# Altium PCB f3.PcbDoc (part 1 of 2)
Units mm, origin at the board's own origin, x right, y up, seen from the top; angles counter-clockwise.
Board outline 43.2 x 39.9 mm, 6 copper layers (Top Layer, layer 2, flex top, flex bottom, layer 5, Bottom Layer), stack 1.565 mm thick; 123 components, 105 nets, 511 pads, 153 vias.
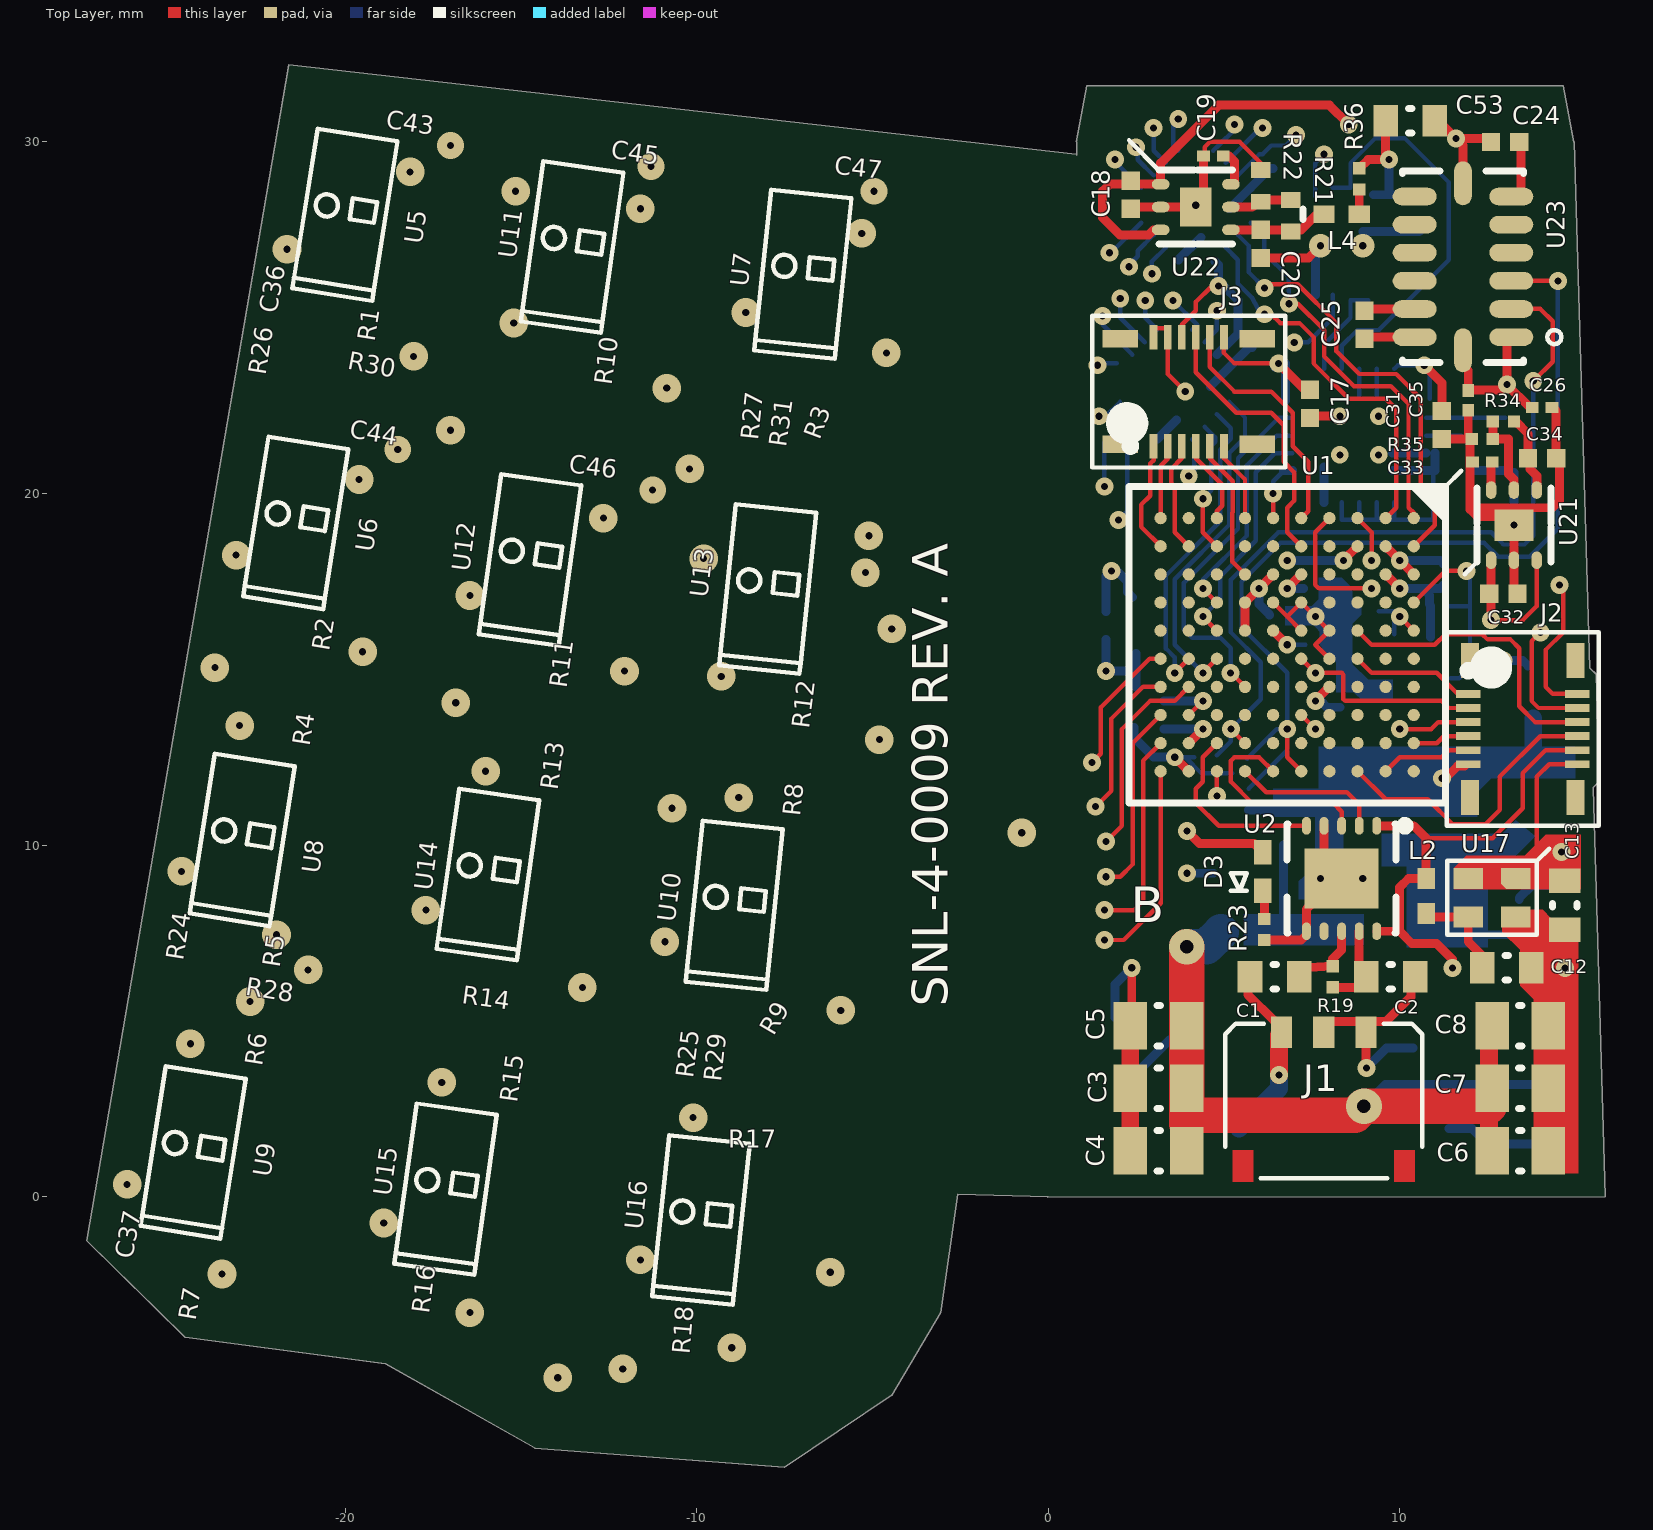
[diagram p0: Top Layer view]
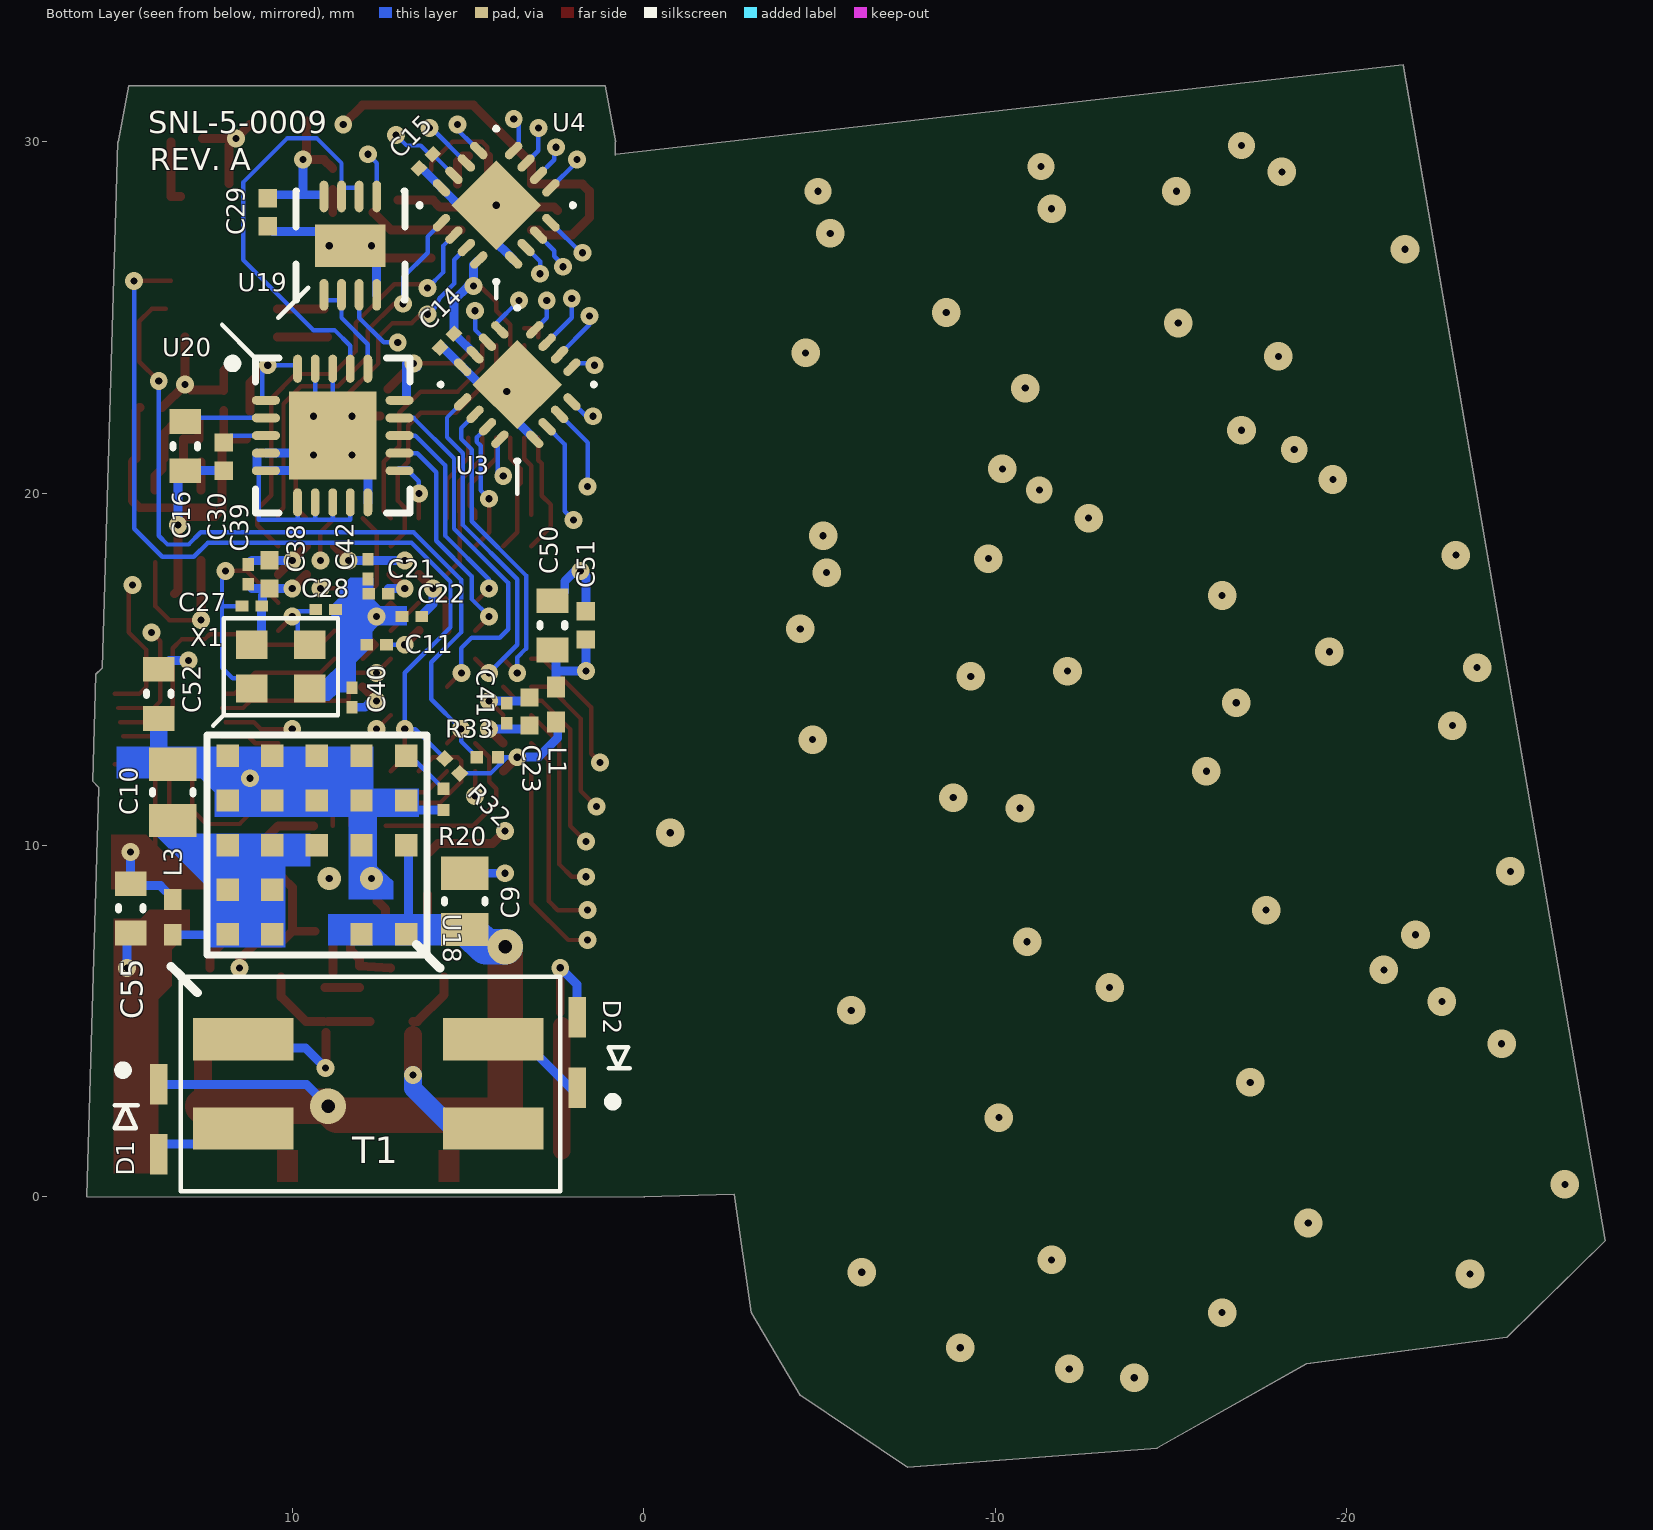
[diagram p1: Bottom Layer view, seen from below]
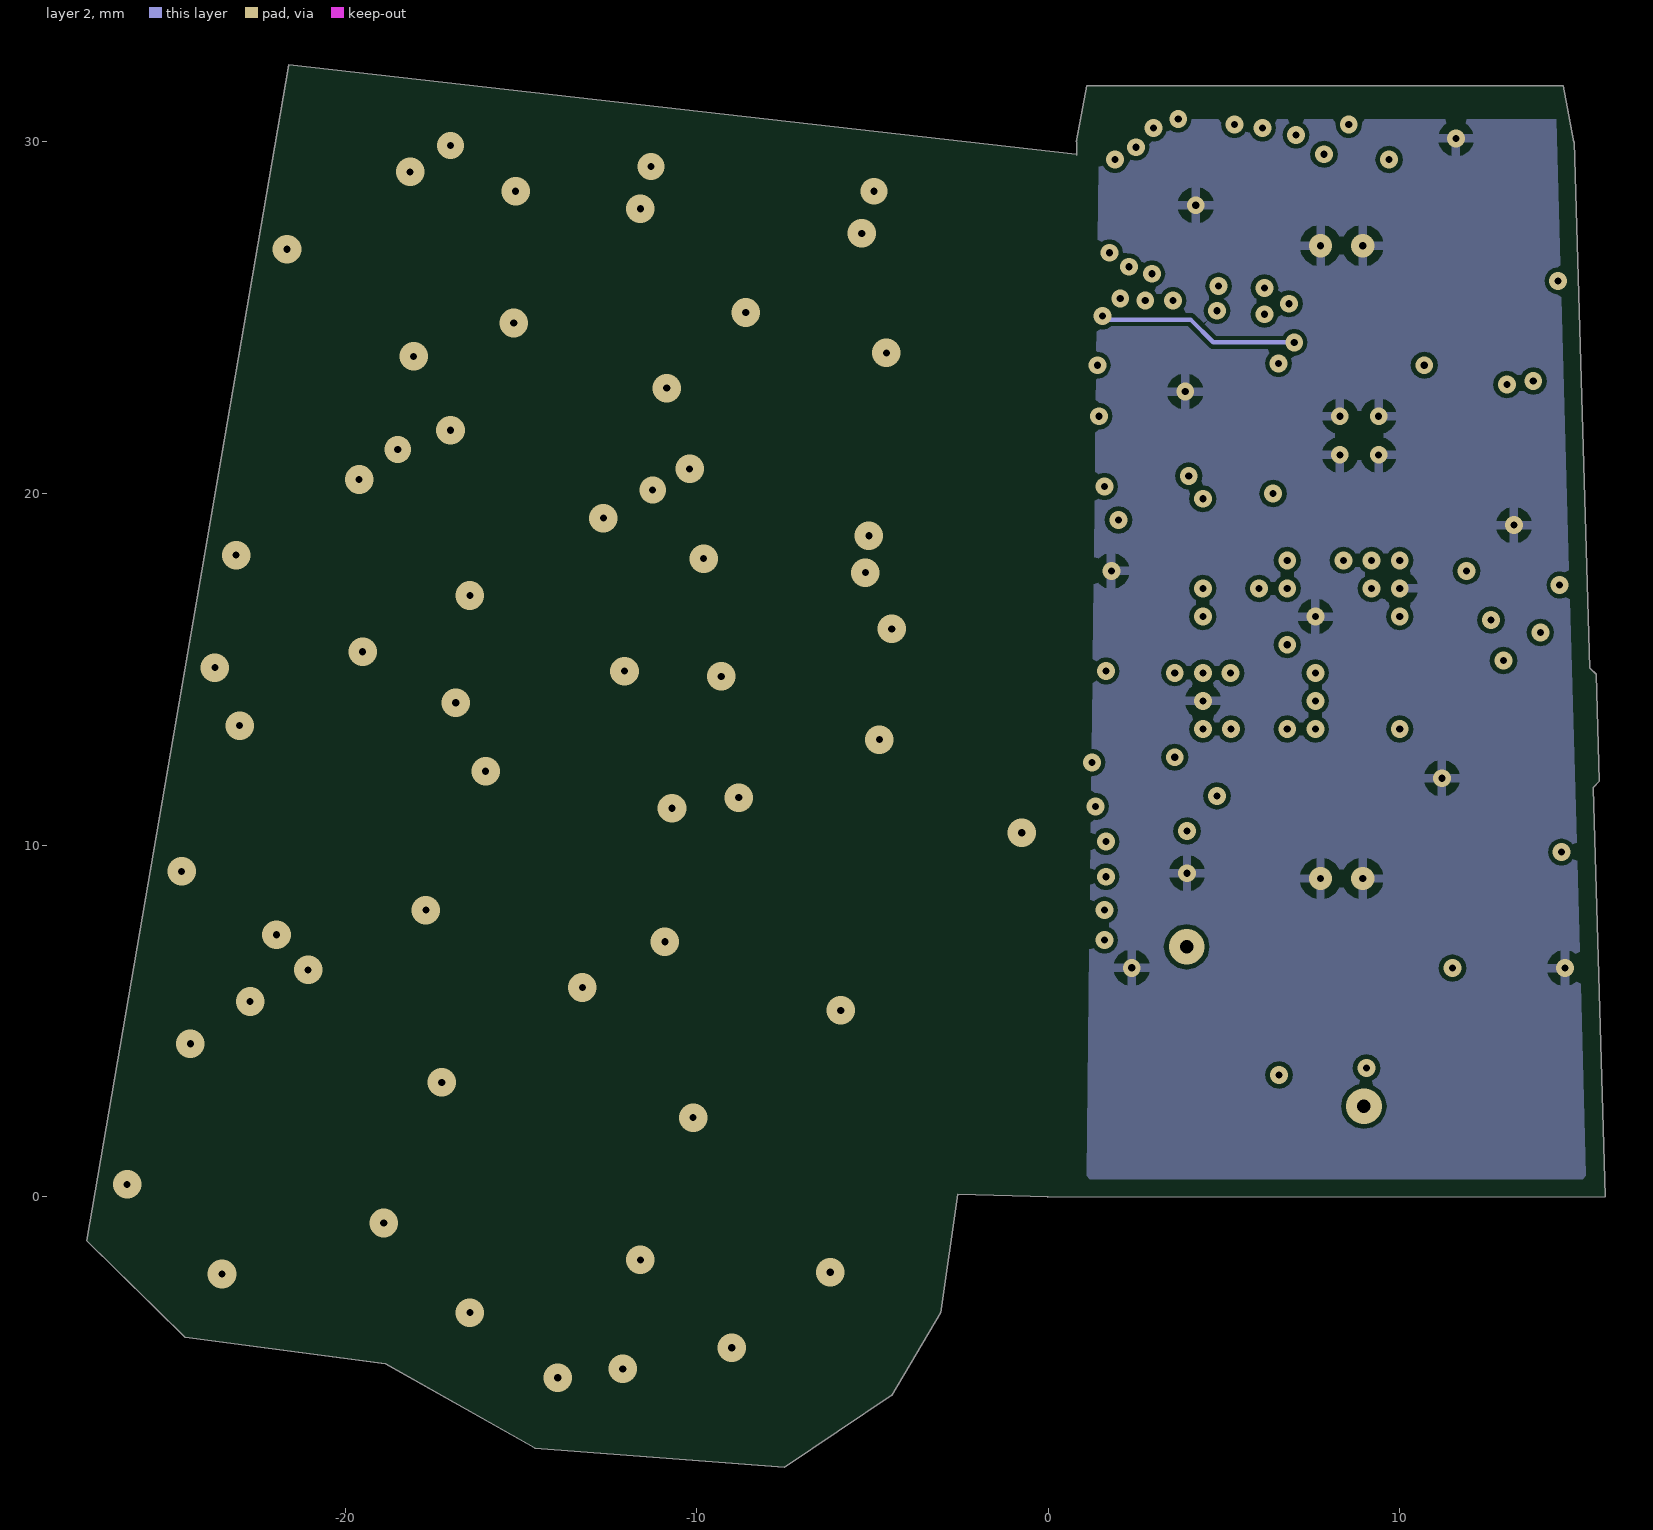
[diagram p2: layer 2]
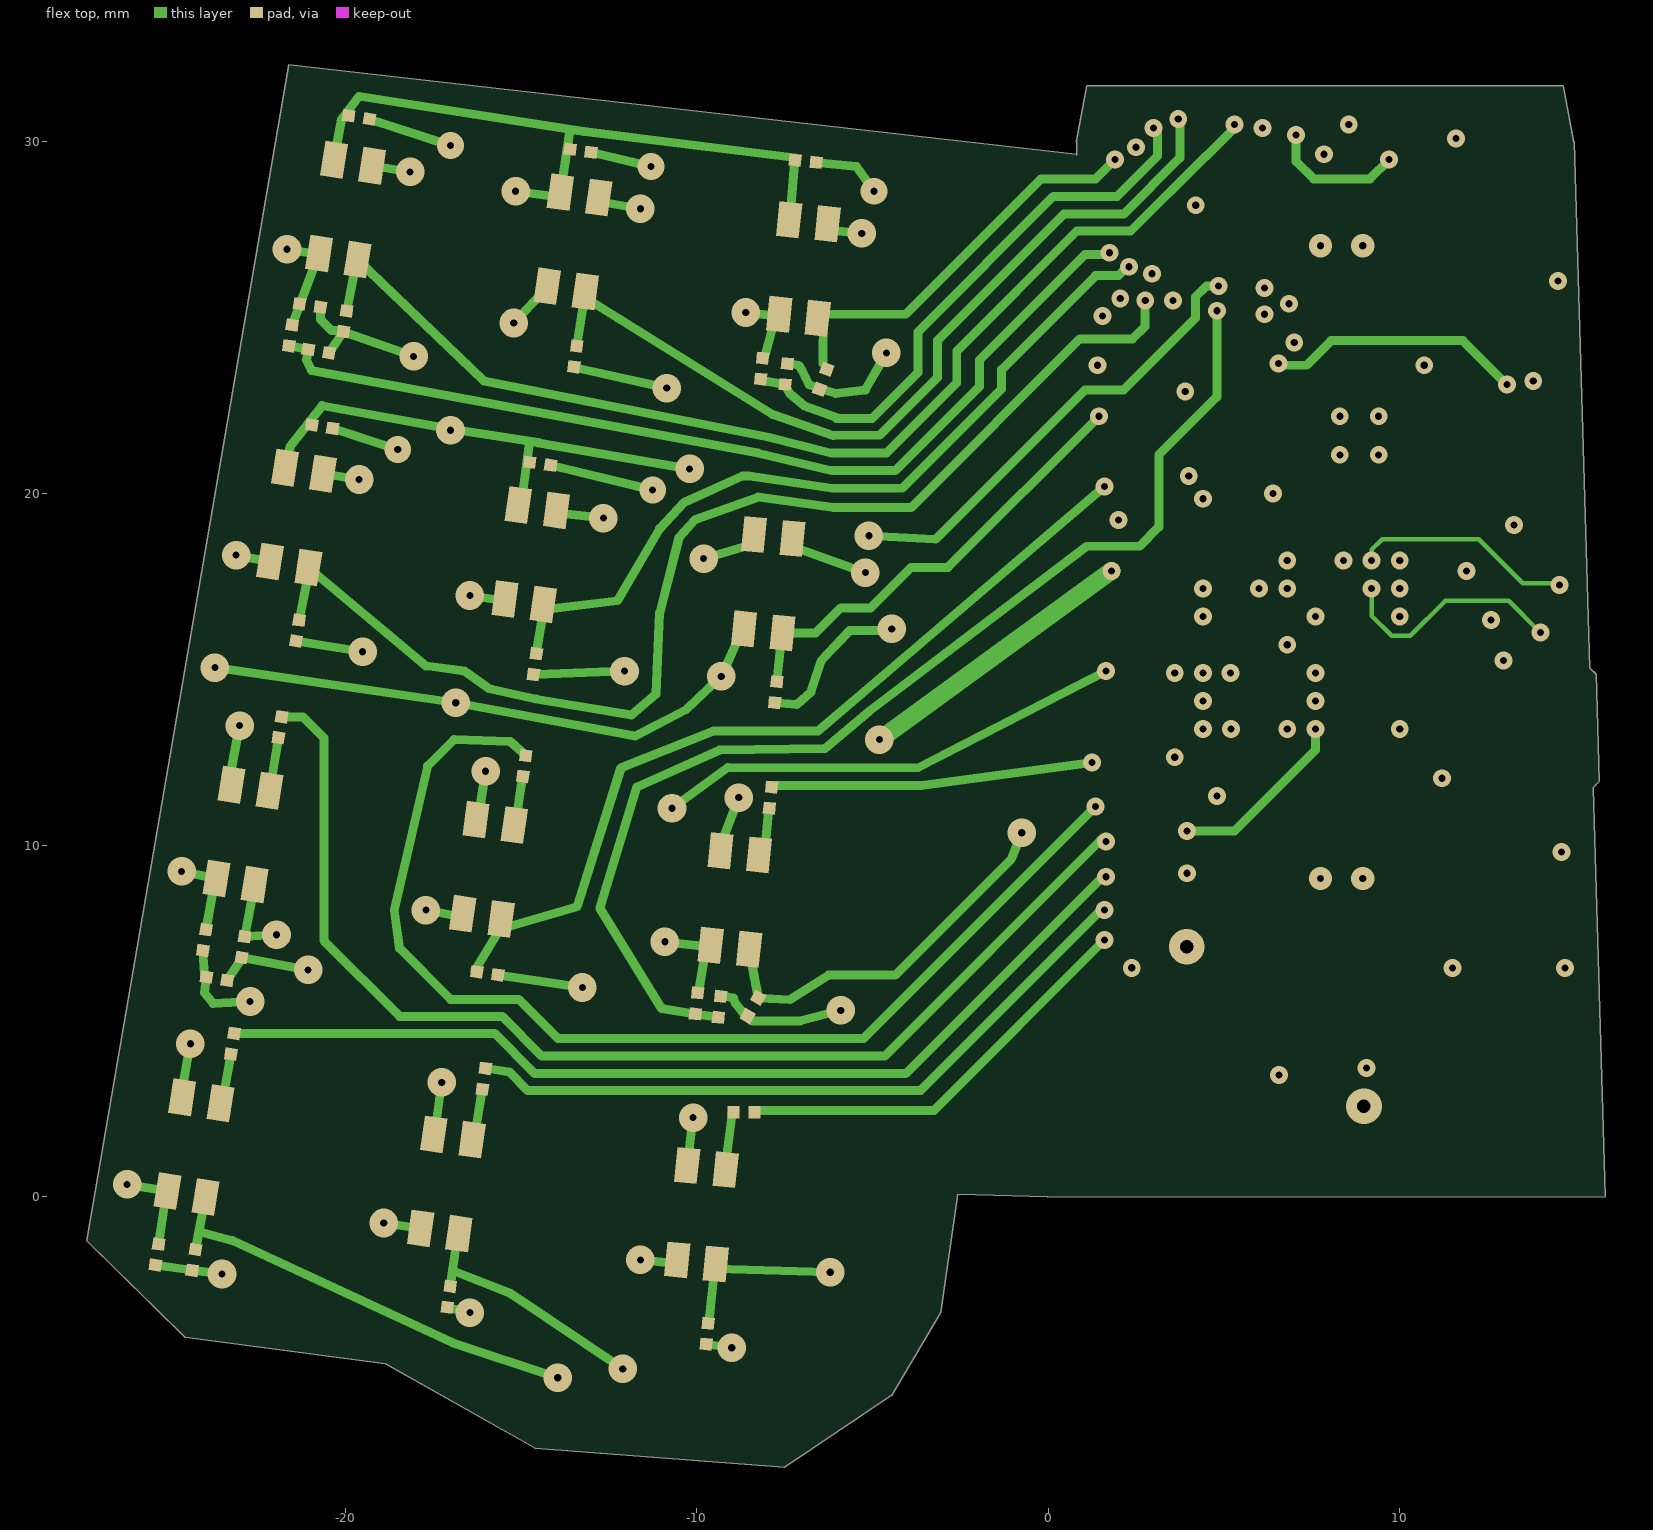
[diagram p3: flex top]
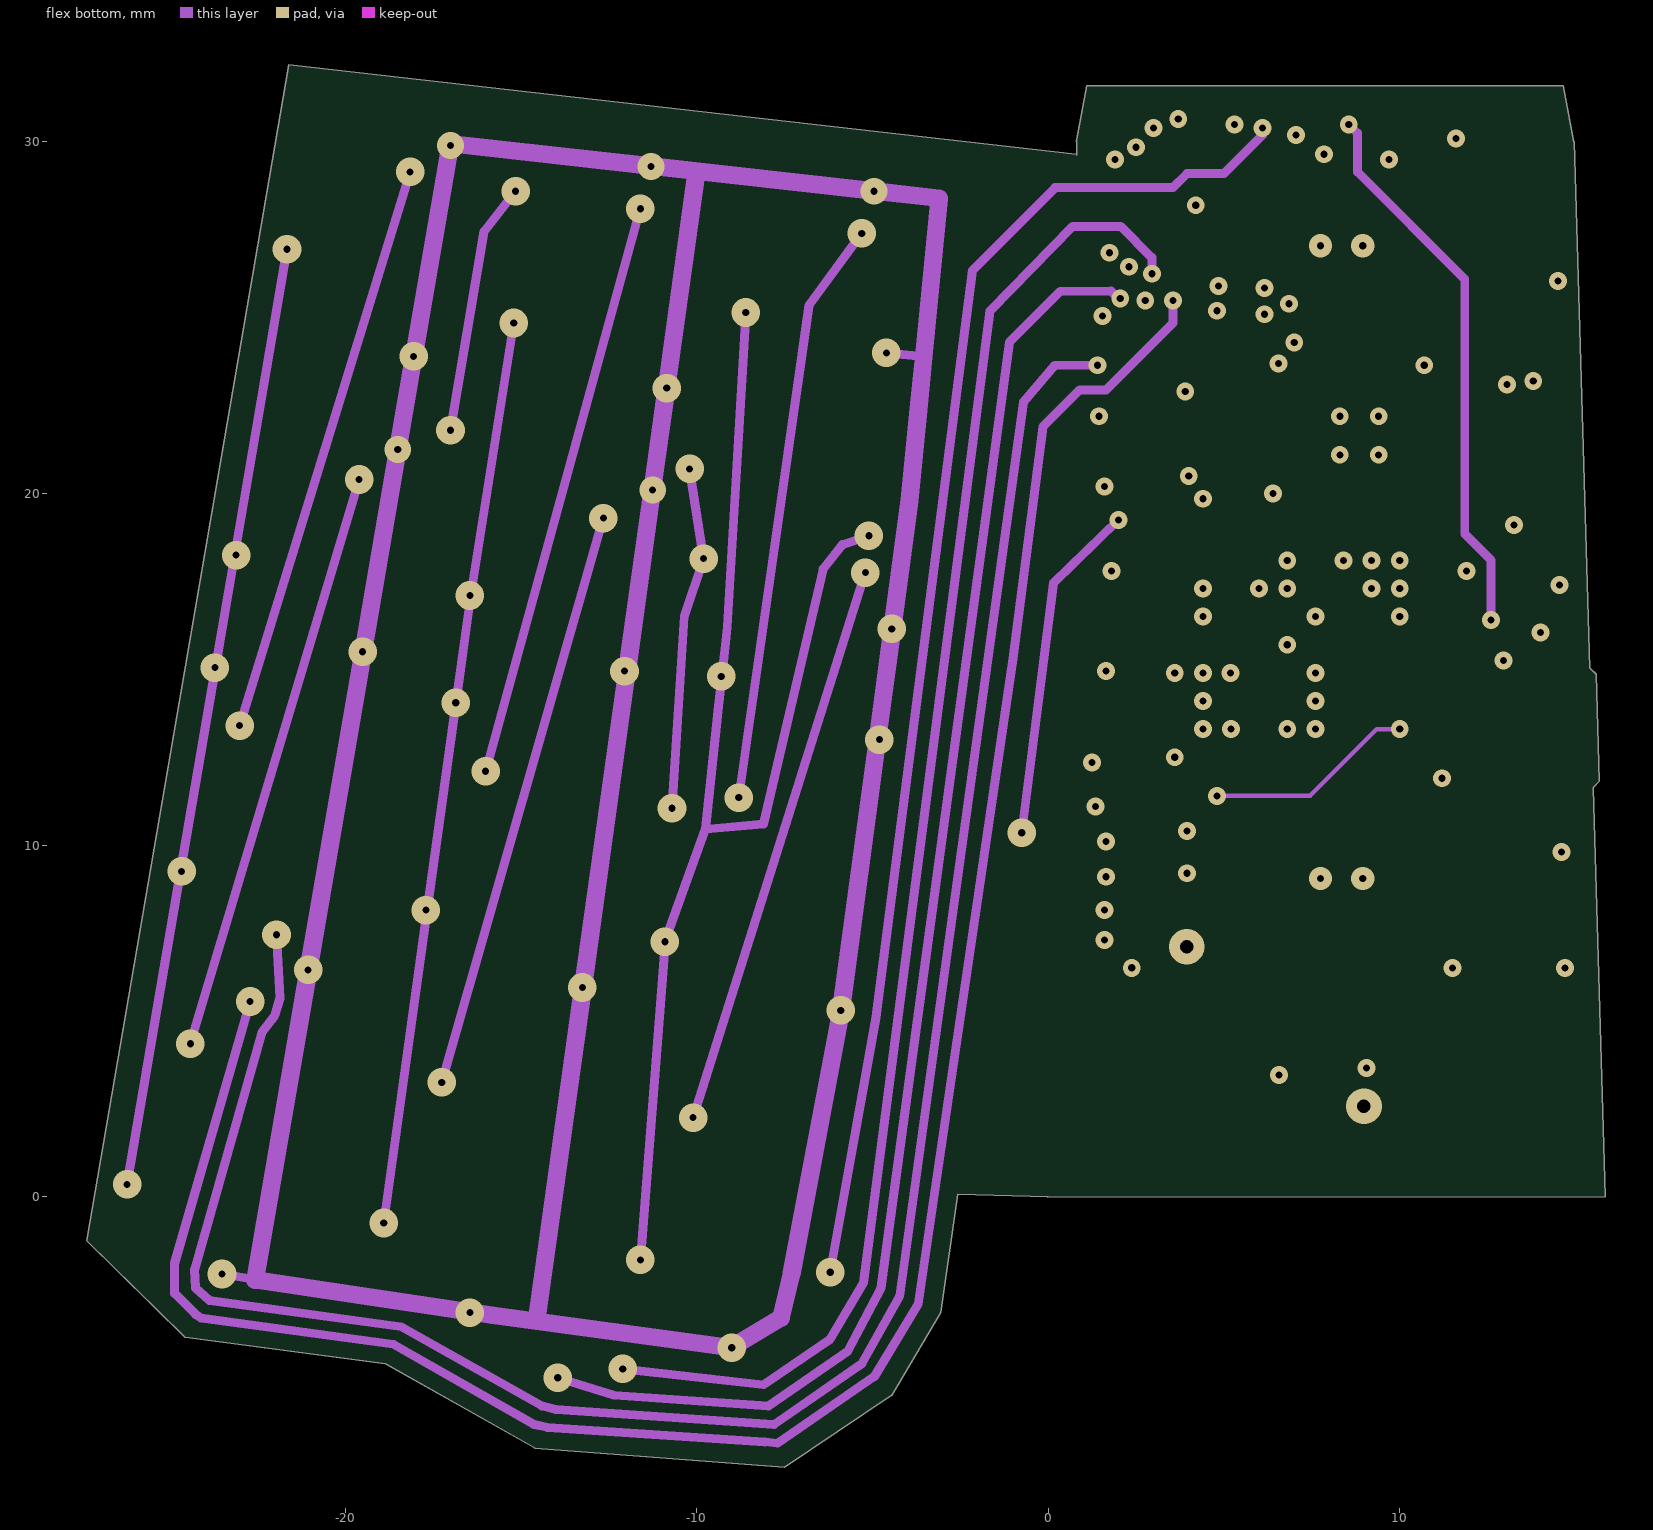
[diagram p4: flex bottom]
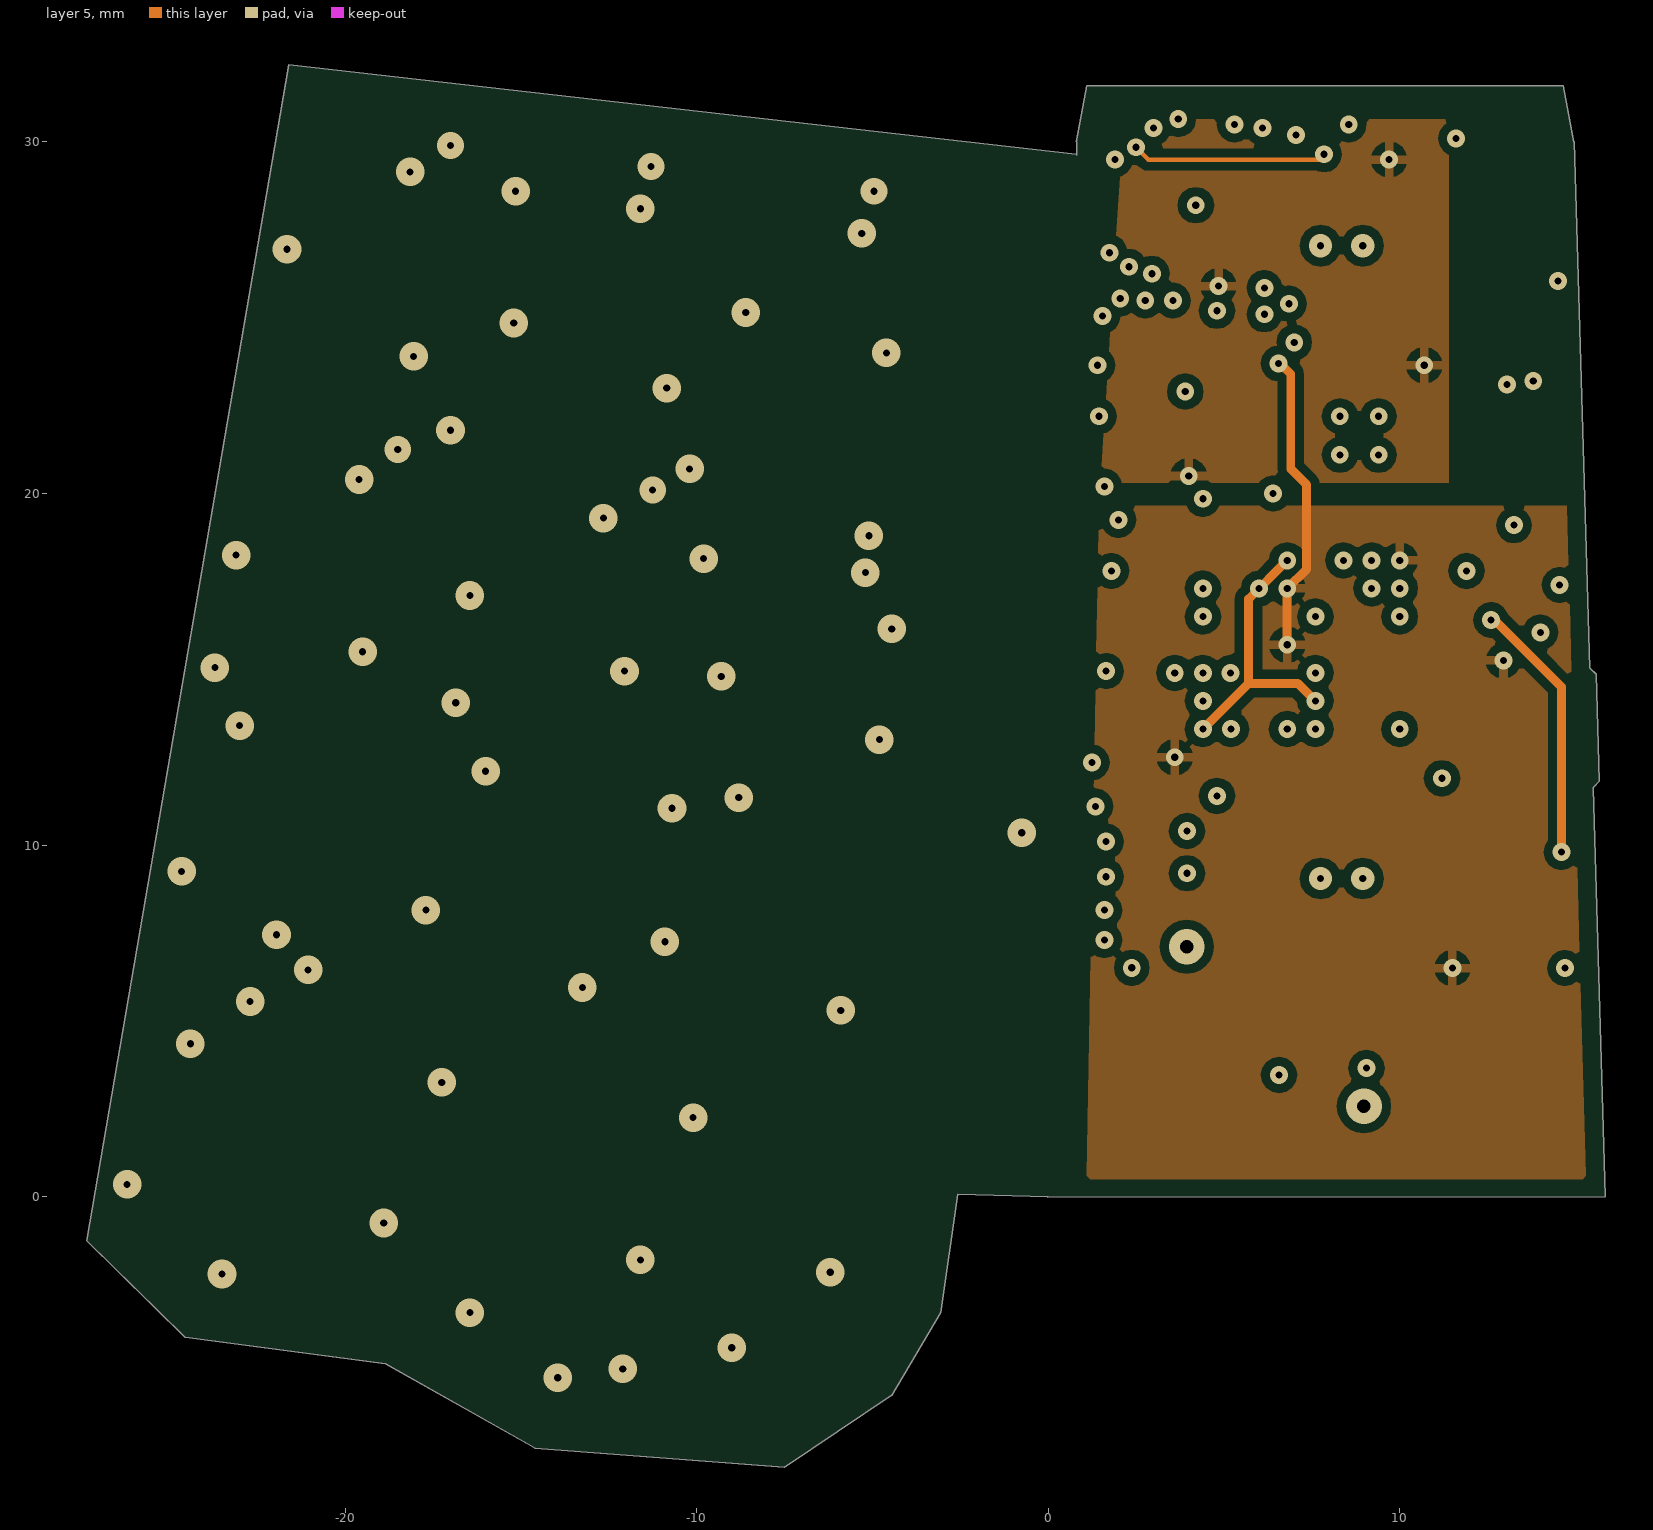
[diagram p5: layer 5]

## Layer stack, top to bottom
Top Layer: signal copper 0.0356
Dielectric: prepreg 0.3937, FR-4, Dk 4.8
layer 2: signal copper 0.0356
Dielectric: core 0.0864, FR-4, Dk 4.8
flex top: signal copper 0.0178
Dielectric: prepreg 0.32, FR-4, Dk 4.8
flex bottom: signal copper 0.0178
Dielectric: core 0.193, FR-4, Dk 4.8
layer 5: signal copper 0.0356
Dielectric: prepreg 0.3937, FR-4, Dk 4.8
Bottom Layer: signal copper 0.0356

## Board outline
-18.85,-4.75 -14.6,-7.15 -7.5,-7.7 -4.45,-5.65 -3.05,-3.3 -2.575,0.073 0,0 -0.014,-0.011 15.85,0 15.505,11.637 15.679,11.822 15.589,14.86 15.404,15.035 14.96,30.001 14.95,30 14.65,31.6 1.1,31.6 0.8,30 0.807,30 0.807,29.629 0.8,29.65 -21.6,32.2 -21.603,32.188 -27.35,-1.25 -24.55,-4

## Design rules (kind name [scope] priority, off if disabled: settings)
Clearance flex_clearance [(OnLayer('flex top') OR OnLayer('flex bottom'))] p1: gap=0.229
Clearance power_polygon_clearance [InNamedPolygon('layer5_3v3') or InNamedPolygon('layer5_4v7')] p2: gap=0.254
Clearance [All] p3: gap=0.127
ComponentClearance [All] p1: gap=0.003 collisioncheckmode=3 verticalgap=0.003 showdistances=FALSE
MinimumSolderMaskSliver [All] p1: minsoldermaskwidth=0.025
PasteMaskExpansion [All] p1: expansion=-0.013
PolygonConnect [All] p1: connectstyle=Relief reliefconductorwidth=0.254 reliefentries=4 polygonreliefangle="90 Angle" airgapwidth=0.254
RoutingVias [All] p1: holewidth=0.203 width=0.508 viastyle="Through Hole" minholewidth=0.203 minwidth=0.508 maxholewidth=0.203 maxwidth=0.508
SilkToSilkClearance [All] p1: silktosilkclearance=0.127
SilkscreenOverComponentPads [All] p1: minsilkscreentomaskgap=0.254
SolderMaskExpansion [All] p1: expansion=0.051
Width [All] p1: maxlimit=1.016 minlimit=0.127 preferedwidth=0.127
23 further rules are at their usual default settings.

## Components (designator, comment, footprint, x,y, rotation, side; value= is the part's Value field where it differs from the comment)
C1 "CAP 1uF 50V 0603(1608)" CAPC0603(1608)100_L 6.443,6.255 r0 top
C2 "CAP 1uF 50V 0603(1608)" CAPC0603(1608)100_L 9.745,6.255 r180 top
C3 "CAP 4.7uF 50V 0805(2012)" CAPC0805(2012)145_L 3.141,3.08 r0 top
C4 "CAP 4.7uF 50V 0805(2012)" CAPC0805(2012)145_L 3.141,1.302 r0 top
C5 "CAP 4.7uF 50V 0805(2012)" CAPC0805(2012)145_L 3.141,4.858 r0 top
C6 "CAP 4.7uF 50V 0805(2012)" CAPC0805(2012)145_L 13.428,1.302 r180 top
C7 "CAP 4.7uF 50V 0805(2012)" CAPC0805(2012)145_L 13.428,3.08 r180 top
C8 "CAP 4.7uF 50V 0805(2012)" CAPC0805(2012)145_L 13.428,4.858 r180 top
C9 "CAP 2.2uF 50V 0805(2012)" CAPC0805(2012)145_L 5.1,8.4 r90 bottom
C10 "CAP 10uF 10V 0805(2012)" CAPC0805(2012)145_L 13.4,11.5 r90 bottom
C11 "CAP 100nF 6.3V 0201(0603)" CAPC0201(0603)33_L 7.6,15.7 r0 bottom
C12 "CAP 10uF 10V 0603(1608)" CAPC0603(1608)100_L 13.047,6.509 r180 top
C13 "CAP 4.7uF 10V 0603(1608)" CAPC0603(1608)100_L 14.698,8.287 r90 top
C14 "CAP 100nF 10V 0201(0603)" CAPC0201(0603)33_L 5.6,24.35 r135 bottom
C15 "CAP 100nF 10V 0201(0603)" CAPC0201(0603)33_L 6.2,29.45 r135 bottom
C16 "CAP 10uF 10V 0603(1608)" CAPC0603(1608)100_L 13.05,21.35 r90 bottom
C17 "CAP 100nF 10V 0402(1005)" CAPC0402(1005)60_L 7.45,22.55 r90 top
C18 "CAP 1uF 10V 0402(1005)" CAPC0402(1005)60_L 2.35,28.5 r90 top
C19 "CAP 100nF 10V 0201(0603)" CAPC0201(0603)33_L 4.7,29.6 r0 top
C20 "CAP 2.2uF 10V 0402(1005)" CAPC0402(1005)60_L 6.05,27.1 r90 top
C21 "CAP 100nF 6.3V 0201(0603)" CAPC0201(0603)33_L 7.55,17.15 r180 bottom
C22 "CAP 100nF 6.3V 0201(0603)" CAPC0201(0603)33_L 6.6,16.5 r180 bottom
C23 "CAP 2.2uF 10V 0402(1005)" CAPC0402(1005)60_L 3.25,13.8 r270 bottom
C24 "CAP 4.7uF 6.3V 0402(1005)" CAPC0402(1005)60_L 13,30 r0 top
C25 "CAP 220nF 16V 0402(1005)" CAPC0402(1005)60_L 9,24.8 r270 top
C26 "CAP 100nF 6.3V 0201(0603)" CAPC0201(0603)33_L 14.05,22.45 r180 top
C27 "CAP 10pF 10V 0201(0603)" CAPC0201(0603)33_L 11.15,16.8 r0 bottom
C28 "CAP 10pF 10V 0201(0603)" CAPC0201(0603)33_L 9.05,16.7 r0 bottom
C29 "CAP 100nF 10V 0402(1005)" CAPC0402(1005)60_L 10.7,28 r270 bottom
C30 "CAP 100nF 10V 0402(1005)" CAPC0402(1005)60_L 11.95,21.05 r90 bottom
C31 "CAP 100nF 10V 0402(1005)" CAPC0402(1005)60_L 11.2,21.95 r90 top
C32 "CAP 1uF 10V 0402(1005)" CAPC0402(1005)60_L 12.95,17.15 r180 top
C33 "CAP 100nF 10V 0201(0603)" CAPC0201(0603)33_L 12.35,20.9 r0 top
C34 "CAP 2.2uF 10V 0402(1005)" CAPC0402(1005)60_L 14.05,21 r180 top
C35 "CAP 100nF 6.3V 0201(0603)" CAPC0201(0603)33_L 11.95,22.65 r90 top
C36 "CAP 220nF 10V 0201(0603)" FLEX_0201 -21,25.35 r171 top
C37 "CAP 220nF 10V 0201(0603)" FLEX_0201 -25.35,-1.65 r81 top
C38 "CAP 2.2uF 10V 0402(1005)" CAPC0402(1005)60_L 10.65,17.7 r90 bottom
C39 "CAP 100nF 6.3V 0201(0603)" CAPC0201(0603)33_L 11.25,17.7 r90 bottom
C40 "CAP 100nF 6.3V 0201(0603)" CAPC0201(0603)33_L 8.3,14.2 r270 bottom
C41 "CAP 100nF 6.3V 0201(0603)" CAPC0201(0603)33_L 3.9,13.75 r270 bottom
C42 "CAP 100nF 6.3V 0201(0603)" CAPC0201(0603)33_L 7.85,17.85 r90 bottom
C43 "CAP 100nF 6.3V 0201(0603)" FLEX_0201 -19.6,30.7 r171 top
C44 "CAP 100nF 6.3V 0201(0603)" FLEX_0201 -20.65,21.9 r171 top
C45 "CAP 100nF 6.3V 0201(0603)" FLEX_0201 -13.3,29.75 r172 top
C46 "CAP 100nF 6.3V 0201(0603)" FLEX_0201 -14.45,20.85 r172 top
C47 "CAP 100nF 6.3V 0201(0603)" FLEX_0201 -6.9,29.45 r174 top
C50 "CAP 10uF 10V 0603(1608)" CAPC0603(1608)100_L 2.6,16.25 r270 bottom
C51 "CAP 2.2uF 10V 0402(1005)" CAPC0402(1005)60_L 1.65,16.25 r270 bottom
C52 "CAP 10uF 10V 0603(1608)" CAPC0603(1608)100_L 13.8,14.3 r90 bottom
C53 "CAP 10uF 10V 0603(1608)" CAPC0603(1608)100_L 10.3,30.6 r180 top
C55 "CAP 10uF 10V 0603(1608)" CAPC0603(1608)100_L 14.6,8.2 r90 bottom
D1 "Diode" SOD-323F 13.8,2.2 r90 bottom
D2 "Diode" SOD-323F 1.9,4.1 r270 bottom
D3 "LED2" DIOM1005X05L 6.1,9.25 r270 top
J1 "JST_ACH_3" JST_ACH_3 7.84,4.223 r90 top
J2 "" MOLEX-51338-9974 13.5,13.3 r0 top
J3 "" MOLEX-51338-9974 4,22.9 r90 top
L1 "Inductor" 0402-A 2.5,14 r90 bottom
L2 "Inductor" 0402-A 10.75,8.55 r90 top
L3 "Inductor" 0402-A 13.4,7.95 r90 bottom
L4 "Inductor" 0402-A 8.35,27.95 r0 top
R1 "68.1K 1% 0201(0603)" FLEX_0201 -20,24.9 r261 top
R2 "68.1K 1% 0201(0603)" FLEX_0201 -21.35,16.1 r261 top
R3 "68.1K 1% 0201(0603)" FLEX_0201 -6.4,23.25 r250 top
R4 "220R 1% 0201(0603)" FLEX_0201 -21.85,13.35 r261 top
R5 "68.1K 1% 0201(0603)" FLEX_0201 -22.9,7.1 r261 top
R6 "220R 1% 0201(0603)" FLEX_0201 -23.2,4.35 r261 top
R7 "68.1K 1% 0201(0603)" FLEX_0201 -24.3,-1.8 r261 top
R8 "220R 1% 0201(0603)" FLEX_0201 -7.9,11.35 r264 top
R9 "68.1K 1% 0201(0603)" FLEX_0201 -8.4,5.4 r240 top
R10 "68.1K 1% 0201(0603)" FLEX_0201 -13.45,23.9 r262 top
R11 "68.1K 1% 0201(0603)" FLEX_0201 -14.6,15.15 r262 top
R12 "68.1K 1% 0201(0603)" FLEX_0201 -7.75,14.35 r264 top
R13 "220R 1% 0201(0603)" FLEX_0201 -14.9,12.25 r262 top
R14 "68.1K 1% 0201(0603)" FLEX_0201 -15.95,6.35 r352 top
R15 "220R 1% 0201(0603)" FLEX_0201 -16.05,3.35 r262 top
R16 "68.1K 1% 0201(0603)" FLEX_0201 -17.05,-2.85 r262 top
R17 "220R 1% 0201(0603)" FLEX_0201 -8.65,2.4 r180 top
R18 "68.1K 1% 0201(0603)" FLEX_0201 -9.7,-3.9 r264 top
R19 "120R 5% 0201(0603)" RESC0201(0603)_L 8.094,6.255 r270 top
R20 "165K 1% 0201(0603)" RESC0201(0603)_L 5.7,11.3 r270 bottom
R21 "180K 1% 0402(1005)" RESC0402(1005)_L 6.9,27.9 r270 top
R22 "64K9 1% 0402(1005)" RESC0402(1005)_L 6.05,28.75 r270 top
R23 "330R 5% 0201(0603)" RESC0201(0603)_L 6.15,7.6 r90 top
R24 "THERMISTOR_0201" FLEX_0201 -24,7.3 r261 top
R25 "THERMISTOR_0201" FLEX_0201 -10,5.5 r264 top
R26 "THERMISTOR_0201" FLEX_0201 -21.55,24.5 r261 top
R27 "THERMISTOR_0201" FLEX_0201 -8.15,23.55 r264 top
R28 "68K1 1% 0201(0603)" FLEX_0201 -23.65,6.2 r171 top
R29 "68K1 1% 0201(0603)" FLEX_0201 -9.35,5.4 r264 top
R30 "68K1 1% 0201(0603)" FLEX_0201 -20.75,24.05 r171 top
R31 "68K1 1% 0201(0603)" FLEX_0201 -7.45,23.4 r264 top
R32 "10K 1% 0201(0603)" RESC0201(0603)_L 5.45,12.25 r225 bottom
R33 "10K 1% 0201(0603)" RESC0201(0603)_L 4.45,12.5 r180 bottom
R34 "113K 1% 0201(0603)" RESC0201(0603)_L 12.95,22.05 r0 top
R35 "68K1 1% 0201(0603)" RESC0201(0603)_L 12.35,21.55 r0 top
R36 "10R 5% 0201(0603)" RESC0201(0603)_L 8.85,28.95 r90 top
T1 "epcos_choke_b82790c" epcos_choke_b82790x 13.428,0.159 r180 bottom
U1 "ATSAM3S4CA-CU" TFBGA100 6.8,15.7 r270 top
U2 "MAX13431E" QFN50P300X300X80-10L 8.348,9.049 r180 top
U3 "ADG1608" QFN50P300X300X80-16L 3.6,23.1 r45 bottom
U4 "ADG1608" QFN50P300X300X80-16L 4.2,28.2 r45 bottom
U5 "EE_SY199" EE_SY199 -20.735,26.829 r81 top locked
U6 "EE_SY199" EE_SY199 -22.132,18.066 r81 top locked
U7 "EE_SY199" EE_SY199 -7.65,25.1 r84 top
U8 "EE_SY199" EE_SY199 -23.656,9.049 r81 top locked
U9 "EE_SY199" EE_SY199 -25.053,0.159 r81 top locked
U10 "EE_SY199" EE_SY199 -9.6,7.15 r84 top
U11 "EE_SY199" EE_SY199 -14.25,25.9 r82 top
U12 "EE_SY199" EE_SY199 -15.45,17 r82 top
U13 "EE_SY199" EE_SY199 -8.65,16.15 r84 top
U14 "EE_SY199" EE_SY199 -16.65,8.05 r82 top
U15 "EE_SY199" EE_SY199 -17.85,-0.9 r82 top
U16 "EE_SY199" EE_SY199 -10.55,-1.8 r84 top
U17 "LXDC2HL" LXDC2Hx 13.301,9.049 r0 top
U18 "LTM8020" LTM8020 9.3,10 r0 bottom
U19 "OPA2320AIDRGT" opamp_dual_3x3 8.35,27.05 r90 bottom
U20 "AD7699BCPZRL7" CP-20-4_L 8.85,21.65 r180 bottom
U21 "MIC5319" MIC5319 13.25,19.1 r90 top
U22 "MIC5319" MIC5319 4.2,28.15 r0 top
U23 "LSM303DLHCTR" LGA14-3X5X1_M 11.8,26.45 r180 top
X1 "CRYSTAL" CRYSTAL_2_2.5 11.6,14.05 r180 bottom

## Footprints (in the part's own frame and the unit in brackets; to place one, negate y for a bottom-side part, rotate by r counter-clockwise, add the part's x,y. Pads: shape width x height; smd on the part's side, far side on the other; paste and mask are expansions set on the pad)
0402-A [mm] "Chip Inductor, Body 1.0x0.5mm, IPC High Density"
  rect 0.6x0.5 smd: 1(-0.5,0) 2(0.5,0)
  body extent -0.55,-0.3 0.55,0.3, height 0.55
CAPC0201(0603)33_L [mm] "Chip Capacitor, Body 0.6x0.3mm, Height 0.33mm, IPC High Density"
  rect 0.36x0.32 smd: 1(-0.28,0) 2(0.28,0)
  body extent -0.32,-0.17 0.32,0.17, height 0.33
CAPC0402(1005)60_L [mm] "Chip Capacitor, Body 1.0x0.5mm, Height 0.6mm, IPC High Density"
  rect 0.52x0.52 smd: 1(-0.4,0) 2(0.4,0)
  body extent -0.55,-0.3 0.55,0.3, height 0.6
CAPC0603(1608)100_L [mm] "Chip Capacitor, Body 1.6x0.8mm, Height 1.0mm, IPC High Density"
  rect 0.7x0.9 smd: 1(-0.7,0) 2(0.7,0)
  silkscreen extent -0.05,-0.35 0.05,0.35, body extent -0.87,-0.47 0.88,0.48, height 1
CAPC0805(2012)145_L [mm] "Chip Capacitor, Body 2.0x1.2mm, Height 1.45mm, IPC High Density"
  rect 0.95x1.35 smd: 1(-0.8,0) 2(0.8,0)
  silkscreen extent -0.05,-0.58 0.05,0.58, body extent -1.1,-0.72 1.1,0.72, height 1.45
CP-20-4_L [mm] "QFN, 20-Leads, Body 4x4mm, Pitch 0.5mm, Thermal Pad 2.5x2.5mm, IPC High Density"
  oval 0.8x0.25 smd: 1(-1.9,1) 2(-1.9,0.5) 3(-1.9,0) 4(-1.9,-0.5) 5(-1.9,-1) 11(1.9,-1) 12(1.9,-0.5) 13(1.9,0) 14(1.9,0.5) 15(1.9,1)
  oval 0.25x0.8 smd: 6(-1,-1.9) 7(-0.5,-1.9) 8(0,-1.9) 9(0.5,-1.9) 10(1,-1.9) 16(1,1.9) 17(0.5,1.9) 18(0,1.9) 19(-0.5,1.9) 20(-1,1.9)
  rect 2.5x2.5 smd: 21(0,0)
  silkscreen extent -2.98,-2.2 2.2,2.2, body extent -2.05,-2.05 2.05,2.05, height 1
CRYSTAL_2_2.5 [mm]
  rect 0.9x0.8 smd: 1(0.45,0.4) 2(2.1,0.4) 3(2.1,1.65) 4(0.45,1.65)
  silkscreen extent -0.35,-0.35 2.9,2.4, body extent 0.05,0.05 2.5,2, height 0.5
DIOM1005X05L [mm] "Molded Diode, 2-Leads, Body 1.0x0.5mm, IPC High Density"
  rect 0.7x0.5 smd: 1(-0.55,0) 2(0.55,0)
  body extent -0.5,-0.25 0.5,0.25, height 0.5
EE_SY199 [mm]
  rect 1x0.65 on Mid2: A(2.7,0) C(0,0) E(0,-1.1) K(2.7,-1.1)
  silkscreen extent -1.1,-1.7 3.5,0.6, body extent -0.2,-1.4 3,0.3, height 1.1
epcos_choke_b82790x [mm]
  rect 2.85x1.2 smd: 1(2.032,4.318) 2(9.144,4.318) 3(9.144,1.778) 4(2.032,1.778)
  silkscreen extent 0.25,0 11.05,6.1, body extent 1.09,0.05 10.09,6.05, height 5.2
FLEX_0201 [mm] "Chip Resistor, Body 0.6x0.3mm, IPC High Density"
  rect 0.35x0.35 on Mid2 paste-10 mask-10: 1(-0.3,0) 2(0.3,0)
  body extent -0.31,-0.16 0.31,0.16, height 0.3
JST_ACH_3 [mm]
  rect 0.9x0.6 smd: 1(0.45,1.2) 2(0.45,0) 3(0.45,-1.2)
  Top Layer region: -3.8,2 -2.9,2 -2.9,2.6 -3.8,2.6
  Top Layer region: -3.8,-2.6 -2.9,-2.6 -2.9,-2 -3.8,-2
  silkscreen extent -3.7,-2.8 0.7,2.8, body extent -3.65,-2.7 0.65,2.7, height 1.4
LGA14-3X5X1_M [mm] "PQFN, 14-Leads, Body 3x5mm, Pitch 0.8mm, IPC Low Density"
  oval 1.25x0.5 smd: 1(-1.375,2) 2(-1.375,1.2) 3(-1.375,0.4) 4(-1.375,-0.4) 5(-1.375,-1.2) 6(-1.375,-2) 8(1.375,-2) 9(1.375,-1.2) 10(1.375,-0.4) 11(1.375,0.4) 12(1.375,1.2) 13(1.375,2)
  oval 0.5x1.25 smd: 7(0,-2.375) 14(0,2.375)
  silkscreen extent -1.72,-2.72 1.73,2.73, body extent -1.57,-2.57 1.58,2.58, height 1
LTM8020 [mm] "LTM8020"
  rect 0.635x0.635 smd: A1(-2.54,2.54) A2(-1.27,2.54) A4(1.27,2.54) A5(2.54,2.54) B4(1.27,1.27) B5(2.54,1.27) C1(-2.54,0) C2(-1.27,0) C3(0,0) C4(1.27,0) C5(2.54,0) D1(-2.54,-1.27) D2(-1.27,-1.27) D3(0,-1.27) D4(1.27,-1.27) D5(2.54,-1.27) E1(-2.54,-2.54) E2(-1.27,-2.54) E3(0,-2.54) E4(1.27,-2.54) E5(2.54,-2.54)
  silkscreen extent -3.13,-3.13 3.13,3.13, body extent -3.13,-3.13 3.13,3.13, height 2.42
LXDC2Hx [mm]
  oct 0.85x0.6 smd: 1(0,0)
  rect 0.85x0.3 smd: 1(0,0.15)
  rect 0.45x0.6 smd: 1(0.2,0)
  rect 0.85x0.6 smd: 2(-1.35,0) 3(-1.35,-1.1) 4(0,-1.1)
  silkscreen extent -1.95,-1.6 0.6,0.5, body extent -1.9,-1.55 0.55,0.45, height 1.1
MIC5319 [mm]
  oval 0.5x0.3 smd: 1(-1,0.65) 2(-1,0) 3(-1,-0.65) 4(1,-0.65) 5(1,0) 6(1,0.65)
  rect 0.9x1.1 smd: 7(0,0)
  silkscreen extent -1.05,-1.05 1.05,1.05, body extent -1.05,-1.05 1.05,1.05, height 0.9
MOLEX-51338-9974 [mm] "MOLEX-51338-9974"
  rect 0.7x0.22 smd: 1(-1.55,1) 2(1.55,1) 3(-1.55,0.6) 4(1.55,0.6) 5(-1.55,0.2) 6(1.55,0.2) 7(-1.55,-0.2) 8(1.55,-0.2) 9(-1.55,-0.6) 10(1.55,-0.6) 11(-1.55,-1) 12(1.55,-1)
  rect 0.5x1 smd: MNT(-1.5,-1.95) MNT(-1.5,1.95) MNT(1.5,-1.95) MNT(1.5,1.95)
  silkscreen extent -2.16,-2.75 2.16,2.75, body extent -1.7,-2.75 1.7,2.75, height 1.42
opamp_dual_3x3 [mm]
  oval 0.9x0.25 smd: 1(-1.4,0.75) 2(-1.4,0.25) 3(-1.4,-0.25) 4(-1.4,-0.75) 5(1.4,-0.75) 6(1.4,-0.25) 7(1.4,0.25) 8(1.4,0.75)
  rect 1.2x2 smd: 9(0,0)
  silkscreen extent -1.55,-1.55 1.55,1.55, body extent -1.55,-1.55 1.55,1.55, height 0.8
QFN50P300X300X80-10L [mm] "QFN, 10-Leads, Body 3.1x3.1mm (max), Pitch 0.50mm, IPC High Density"
  oval 0.25x0.5 smd: 1(-1,-1.5) 2(-0.5,-1.5) 3(0,-1.5) 4(0.5,-1.5) 5(1,-1.5) 6(1,1.5) 7(0.5,1.5) 8(0,1.5) 9(-0.5,1.5) 10(-1,1.5)
  rect 2.1x1.7 smd: 11(0,0)
  silkscreen extent -1.92,-1.62 1.55,1.55, body extent -1.55,-1.55 1.55,1.55, height 0.8
QFN50P300X300X80-16L [mm] "QFN, 16-Leads, Body 3.1x3.1mm (max), Pitch 0.50mm, IPC High Density"
  oval 0.6x0.25 smd: 1(-1.45,0.75) 2(-1.45,0.25) 3(-1.45,-0.25) 4(-1.45,-0.75) 9(1.45,-0.75) 10(1.45,-0.25) 11(1.45,0.25) 12(1.45,0.75)
  oval 0.25x0.6 smd: 5(-0.75,-1.45) 6(-0.25,-1.45) 7(0.25,-1.45) 8(0.75,-1.45) 13(0.75,1.45) 14(0.25,1.45) 15(-0.25,1.45) 16(-0.75,1.45)
  rect 1.8x1.8 smd: PAD(0,0)
  silkscreen extent -1.55,-1.55 1.55,1.55, body extent -1.55,-1.55 1.55,1.55, height 0.8
RESC0201(0603)_L [mm]
  rect 0.35x0.35 smd: 1(-0.3,0) 2(0.3,0)
  body extent -0.31,-0.16 0.31,0.16, height 0.3
RESC0402(1005)_L [mm] "Chip Resistor, Body 1.0x0.5mm, IPC High Density"
  rect 0.45x0.55 smd: 1(-0.45,0) 2(0.45,0)
  body extent -0.52,-0.27 0.53,0.28, height 0.4
SOD-323F [mm] "SOD-323F"
  rect 1.15x0.5 smd: 1(-1,0) 2(1,0)
  silkscreen extent 1.27,0.89 1.52,1.14, body extent -0.9,-0.67 0.9,0.67, height 0.8
TFBGA100 [mm] "BGA, 100-Leads, Body 9x9mm, Pitch 0.8mm"
  round 0.35 smd: A1(-3.6,3.6) A2(-2.8,3.6) A3(-2,3.6) A4(-1.2,3.6) A5(-0.4,3.6) A6(0.4,3.6) A7(1.2,3.6) A8(2,3.6) A9(2.8,3.6) A10(3.6,3.6) B1(-3.6,2.8) B2(-2.8,2.8) B3(-2,2.8) B4(-1.2,2.8) B5(-0.4,2.8) B6(0.4,2.8) B7(1.2,2.8) B8(2,2.8) B9(2.8,2.8) B10(3.6,2.8) C1(-3.6,2) C2(-2.8,2) C3(-2,2) C4(-1.2,2) C5(-0.4,2) C6(0.4,2) C7(1.2,2) C8(2,2) C9(2.8,2) C10(3.6,2) D1(-3.6,1.2) D2(-2.8,1.2) D3(-2,1.2) D4(-1.2,1.2) D5(-0.4,1.2) D6(0.4,1.2) D7(1.2,1.2) D8(2,1.2) D9(2.8,1.2) D10(3.6,1.2) E1(-3.6,0.4) E2(-2.8,0.4) E3(-2,0.4) E4(-1.2,0.4) E5(-0.4,0.4) E6(0.4,0.4) E7(1.2,0.4) E8(2,0.4) E9(2.8,0.4) E10(3.6,0.4) F1(-3.6,-0.4) F2(-2.8,-0.4) F3(-2,-0.4) F4(-1.2,-0.4) F5(-0.4,-0.4) F6(0.4,-0.4) F7(1.2,-0.4) F8(2,-0.4) F9(2.8,-0.4) F10(3.6,-0.4) G1(-3.6,-1.2) G2(-2.8,-1.2) G3(-2,-1.2) G4(-1.2,-1.2) G5(-0.4,-1.2) G6(0.4,-1.2) G7(1.2,-1.2) G8(2,-1.2) G9(2.8,-1.2) G10(3.6,-1.2) H1(-3.6,-2) H2(-2.8,-2) H3(-2,-2) H4(-1.2,-2) H5(-0.4,-2) H6(0.4,-2) H7(1.2,-2) H8(2,-2) H9(2.8,-2) H10(3.6,-2) J1(-3.6,-2.8) J2(-2.8,-2.8) J3(-2,-2.8) J4(-1.2,-2.8) J5(-0.4,-2.8) J6(0.4,-2.8) J7(1.2,-2.8) J8(2,-2.8) J9(2.8,-2.8) J10(3.6,-2.8) K1(-3.6,-3.6) K2(-2.8,-3.6) K3(-2,-3.6) K4(-1.2,-3.6) K5(-0.4,-3.6) K6(0.4,-3.6) K7(1.2,-3.6) K8(2,-3.6) K9(2.8,-3.6) K10(3.6,-3.6)
  silkscreen extent -4.5,-4.5 4.5,4.5, body extent -4.5,-4.5 4.5,4.5, height 1.2

## Part data
C1 C2: library part CMP-1035-02745-1, "CAP 1uF 50V ±10% 0603 (1608 Metric) Thickness 1mm SMD"
C3 C4 C5 C6 C7 C8: library part CMP-1036-04900-1, "CAP 4.7uF 50V ±10% 0805 (2012 Metric) Thickness 1.45mm SMD"
C9: library part CMP-1036-04844-1, "CAP 2.2uF 50V ±10% 0805 (2012 Metric) Thickness 1.45mm SMD"
C10: library part CMP-1036-04922-1, "CAP 10uF 10V ±10% 0805 (2012 Metric) Thickness 1.45mm SMD"
C11 C21 C22 C26 C35 C39 C40 C41 C42 C43 C44 C45 C46 C47: library part CMP-1033-00660-1, "CAP 100nF 6.3V ±10% 0201 (0603 Metric) Thickness 0.33mm SMD"
C12 C16 C50 C52 C53 C55: library part CMP-1035-02799-1, "CAP 10uF 10V ±10% 0603 (1608 Metric) Thickness 1mm SMD"
C13: library part CMP-1035-02785-1, "CAP 4.7uF 10V ±10% 0603 (1608 Metric) Thickness 1mm SMD"
C14 C15 C19 C33: library part CMP-1033-00662-1, "CAP 100nF 10V ±10% 0201 (0603 Metric) Thickness 0.33mm SMD"
C17 C29 C30 C31: library part CMP-1034-02065-1, "CAP 100nF 10V ±10% 0402 (1005 Metric) Thickness 0.6mm SMD"
C18 C32: library part CMP-1034-02116-1, "CAP 1uF 10V ±10% 0402 (1005 Metric) Thickness 0.6mm SMD"
C20 C23 C34 C38 C51: library part CMP-1034-02127-1, "CAP 2.2uF 10V ±10% 0402 (1005 Metric) Thickness 0.6mm SMD"
C24: library part CMP-1034-02136-1, "CAP 4.7uF 6.3V ±10% 0402 (1005 Metric) Thickness 0.6mm SMD"
C25: library part CMP-1034-02089-1, "CAP 220nF 16V ±10% 0402 (1005 Metric) Thickness 0.6mm SMD"
C27 C28: library part CMP-1033-00354-1, "CAP 10pF 10V ±10% 0201 (0603 Metric) Thickness 0.33mm SMD"
C36 C37: library part CMP-1033-00672-1, "CAP 220nF 10V ±10% 0201 (0603 Metric) Thickness 0.33mm SMD"
D1 D2: "Default Diode"
D3: "Typical RED, GREEN, YELLOW, AMBER GaAs LED"
J2 J3: library part "Header 6X2", "Header, 6-Pin, Dual row"
R1: library part CMP-1010-00642-1, "100K 0.05W 1% 0201 (0603 Metric)  SMD"
R2 R3 R5 R7 R9 R10 R11 R12 R14 R16 R18: library part CMP-1010-00642-1, "68.1K 0.05W 1% 0201 (0603 Metric)  SMD"
R4 R6 R8 R13 R15 R17: library part CMP-1010-00339-1, "220R 0.05W 1% 0201 (0603 Metric)  SMD"
R19: library part CMP-1010-00052-1, "120R 0.05W 5% 0201 (0603 Metric)  SMD"
R20: library part CMP-1010-00665-1, "165K 0.05W 1% 0201 (0603 Metric)  SMD"
R21: library part CMP-1011-00763-1, "180K 0.063W 1% 0402 (1005 Metric)  SMD"
R22: library part CMP-1011-00715-1, "64K9 0.063W 1% 0402 (1005 Metric)  SMD"
R23: library part CMP-1010-00062-1, "330R 0.05W 5% 0201 (0603 Metric)  SMD"
R28 R29 R30 R31 R35: library part CMP-1010-00624-1, "68K1 0.05W 1% 0201 (0603 Metric)  SMD"
R32 R33: library part CMP-1010-00529-1, "10K 0.05W 1% 0201 (0603 Metric)  SMD"
R34: library part CMP-1010-00647-1, "113K 0.05W 1% 0201 (0603 Metric)  SMD"
R36: library part CMP-1010-00026-1, "10R 0.05W 5% 0201 (0603 Metric)  SMD"
U1: library part CMP-0076-00118-1, "AT91 ARM Cortex-M3 32-bit Microcontroller, 256KB Flash, 48KB SRAM, 16-ch. ADC, 79 User I/Os, 100-Pin BGA, Industrial Grade (-40°C to 85°C), Pb-Free"
U5 U6 U7 U8 U9 U10 U11 U12 U13 U14 U15 U16: "Omron EE-SY199"
U17: library part MURATA_LXDC2HL
U19: library part OPAMP_DUAL
U20: library part CMP-0313-00572-1, "Octal 16-Bit PulSAR Analog-to-Digital Converter with Serial, SPI Interface, 500KSPS, -40 to +85 degC, CP-20-4, Pb-Free, Reel"
U23: library part CMP-0234-00035-1, "Ultra compact high performance e-compass: 3D accelerometer and 3D magnetometer module, -40 to +85°C, LGA-14 (3x5x1), Tape and Reel"

## Via types
v1: diameter 0.508, hole 0.203, Top Layer to Bottom Layer, tented both sides, 86 vias
v2: diameter 0.813, hole 0.203, Top Layer to Bottom Layer, tented both sides, 51 vias
v3: diameter 0.762, hole 0.203, Top Layer to Bottom Layer, tented both sides, 5 vias
v4: diameter 0.66, hole 0.203, Top Layer to Bottom Layer, tented both sides, 4 vias
v5: diameter 0.5, hole 0.203, Top Layer to Bottom Layer, tented top, 4 vias
v6: diameter 1.016, hole 0.381, Top Layer to Bottom Layer, tented both sides, 2 vias
v7: diameter 0.508, hole 0.203, Top Layer to Bottom Layer, tented bottom, 1 vias

## Nets (pads, with @x,y where several pads share a name; then routed paths per layer and width w, separated by ;. In a path a pad name is that pad's centre, name@x,y a point inside that pad or via, vN(x,y) a via of type N, cw(c..) or ccw(c..) an arc to the next point about the centre after c; other vN are vias at no path point)
1V8: C22.2 C23.2 C40.2 C41.2 C42.2 U1.C2 U1.D7 U1.F3 U1.G4 U1.G5 U1.J9 | length 15.9
  Top Layer w0.254: U1.J9@4,12.9 v1(4.4,13.3) ; U1.G5@5.6,16.1 U1.G4@5.6,16.9 U1.F3@6.4,17.7 ; v1(7.6,14.1) U1.D7@8,14.5 ; v1(8.4,18.1) U1.C2@8.8,18.5
  layer 5 w0.254: v1(4.4,13.3) 5.7,14.6 ; v1(6.8,18.1) 5.7,17 5.7,14.6 ; v1(7.6,14.1) 7.1,14.6 5.7,14.6
  Bottom Layer w0.254: C23.2@3.3,13.3 v1(4.4,13.3) ; v1@6,17.32 v1(6,17.3) 6,16.85 C22.2@6.3,16.55 ; v1(6.8,18.1) v1(8.4,18.1) ; v1(7.6,14.1) 7.75,14.1 7.93,13.92 C40.2@8.3,13.92
3V3: C11.1 C17.2 C21.2 C26.2 C35.2 C38.2 C39.2 C52.2 J2.10 J3.12 L1.1 L2.2 R32.2 R33.2 U1.A3 U1.B2 U1.E3 U1.F5 U1.J10 U2.1 U2.10 U20.15 U23.1 U23.14 | length 47.2
  Top Layer w0.127: J3.12@5,24.45 5,24 5.3,23.7 v1(6.55,23.7) ; 10.75,10.2 12.65,10.2 13.5,11.05 13.5,12.05 14.15,12.7 J2.10@14.815,12.7
  Top Layer w0.254: v1(3.6,12.5) U1.J10@4,12.1 ; U1.F5@6.4,16.1 v1(6.8,15.7) ; v1(6.55,23.7) C17.2@7.275,22.975 ; v1(6.8,17.3) U1.E3@7.2,17.7 ; U2.10@9.348,7.549 9.749,7.549 10,7.55 ; U2.1@9.398,10.549 10.4,10.549 ; U1.B2@9.6,18.5 v1(10,18.1) U1.A3@10.4,17.7 ; 10.4,10.55 10.75,10.2 L2.2@10.75,9.05 ; L2.2@10.7,9.05 10.25,9.05 10,8.8 10,7.55 ; v1(11.5,6.5) 11.5,6.75 11.05,7.2 10.35,7.2 10,7.55 ; U23.14@11.8,23.65 11.95,23.5 C35.2@11.95,22.93 11.97,22.95 12.9,22.95 v1(13.05,23.1) ; U23.1@13.05,24.45 v1(13.05,23.1) ; C26.2@13.7,22.45 v1(13.05,23.1)
  flex top w0.254: v1(6.55,23.7) 6.6,23.65 7.35,23.65 8.05,24.35 11.8,24.35 v1(13.05,23.1)
  layer 5 w0.254: v1@6.65,23.65 6.9,23.4 6.9,20.7 7.35,20.25 7.35,17.85 v1(6.8,17.3) v1(6.8,15.7)
  Bottom Layer w0.127: v1(3.6,12.5) 3.9,12.5 ; R33.2@4.15,12.5 3.9,12.5 ; R32.2@5.238,12.038 4.362,12.038 3.9,12.5 ; v1(6.8,15.7) C11.1@7.32,15.7
  Bottom Layer w0.254: L1.1@2.45,13.35 2.45,13.05 3,12.5 v1(3.6,12.5) ; v1@6.45,23.6 v1(6.55,23.7) v1@6.6,23.75 ; U20.15@6.75,22.65 v1@6.75,23.7 ; v1(6.8,17.3) C21.2@7.27,17.3 ; v1(10,18.1) C38.2@10.65,18.1 11.15,18.1 C39.2@11.25,18 ; v1(12.95,15.25) 13.5,15.25 C52.2@13.65,15.1
3V3_ANALOG: C34.2 R34.2 U21.4 | length 2.2
  Top Layer w0.254: R34.2@13.3,22.05 13.65,21.7 C34.2@13.65,21 ; C34.2@13.7,21 13.7,20.7 13.9,20.5 U21.4@13.9,20.1
3V3_PHOTO: C43.2 C44.2 C45.2 C46.2 C47.2 C50.2 C51.2 L1.2 U5.A U6.A U7.A U11.A U12.A U13.A | length 68.3
  flex bottom w0.254: v2(-17,21.8) -16.05,27.45 v2(-15.15,28.6) ; v2(-10.7,11.05) -10.35,16.5 v2(-9.8,18.15) v2(-10.2,20.7)
  flex top w0.254: U6.A@-21.713,20.757 -21.55,21.35 -20.65,22.5 -16.995,21.833 -14.5,21.45 ; U5.A@-20.313,29.496 -20.1,30.639 -19.6,31.3 -13.2,30.3 -7.2,29.55 U7.A@-7.36,27.709 ; v2(-15.15,28.6) U11.A@-14.05,28.45 ; U12.A@-15.003,19.607 -14.75,21.45 ; -14.502,21.434 v2(-10.2,20.7) ; U11.A@-13.901,28.36 -13.6,30.35 ; v2(-10.7,11.05) -9.108,12.208 -3.7,12.2 v1(1.65,14.95) ; v2(-9.8,18.15) U13.A@-8.598,18.497
  Bottom Layer w0.254: C51.2@1.65,15.85 v1(1.65,14.95) 2.5,14.95 ; L1.2@2.5,14.5 2.5,14.95 ; C50.2@2.5,15.45 2.5,14.95
4V7_ANALOG: C14.2 C15.2 C29.1 C31.2 C36.2 C37.2 C53.2 J3.6 R24.1 R25.1 R26.1 R27.1 R36.2 U3.11 U3.16 U4.11 U4.16 U5.C U6.C U7.C U8.C U9.C U10.C U11.C U12.C U13.C U14.C U15.C U16.C U19.8 U20.1 U20.20 | length 159.8
  Top Layer w0.127: J3.6@3.8,24.215 3.8,24.8 4.2,25.2 4.2,25.45 4.65,25.9 v1(4.85,25.9)
  Top Layer w0.254: R36.2@8.85,29.25 9.1,29.5 9.6,29.5 C53.2@9.6,30.6 ; v1(10.7,23.65) 11.2,23.15 C31.2@11.2,22.35
  flex bottom w0.254: v2(-26.2,0.35) -24.677,9.255 -23.686,15.048 -23.137,18.256 v2(-21.65,26.95) ; v2(-18.9,-0.75) -17.669,8.114 -16.845,14.049 -16.422,17.096 v2(-15.2,24.85) ; v2(-11.6,-1.8) v2@-10.888,7.299 ; v2(-10.9,7.25) -9.75,10.45 ; v2(-8.6,25.15) -9.128,16.198 -9.281,14.798 -9.373,13.953 -9.75,10.45 ; v2(-5.1,18.8) -5.85,18.55 -6.4,17.85 -8.099,10.6 -9.75,10.45
  flex top w0.254: v2(-26.2,0.35) U9.C@-25.073,0.162 ; C37.2@-25.303,-1.354 U9.C@-25.1,0 ; v2(-24.65,9.25) U8.C@-23.656,9.049 ; R24.1@-23.953,7.596 U8.C@-23.7,9 ; v2(-23.7,15.05) v2(-16.85,14.05) -11.75,13.1 -10.3,13.85 v2(-9.3,14.8) U13.C@-8.75,16 ; v2(-23.1,18.25) -23.15,18.25 -23.102,18.241 U6.C@-22.132,18.066 ; v2(-21.65,26.95) -20.75,26.8 R26.1@-21.5,24.8 ; v2(-18.9,-0.75) U15.C@-17.9,-0.9 ; v2(-17.7,8.15) U14.C@-16.65,7.95 ; v2(-16.45,17.1) U12.C@-15.5,16.95 ; v2(-15.2,24.85) U11.C@-14.4,25.7 ; v2(-11.6,-1.8) U16.C@-10.55,-1.9 ; v2@-10.901,7.245 U10.C@-9.724,7.117 ; R25.1@-9.95,5.8 U10.C@-9.75,7 ; v2(-8.6,25.15) U7.C@-7.7,25.05 ; R27.1@-8.05,23.95 U7.C@-7.731,25.102 ; v2(-5.1,18.8) -3.2,18.7 1.05,22.95 2.15,22.95 4.19,24.99 4.19,25.59 4.5,25.9 v1(4.85,25.9) ; v1(7.05,30.2) 7.05,29.45 7.55,28.95 9.15,28.95 v1(9.7,29.5)
  Bottom Layer w0.127: U3.16@4.095,21.544 4.15,21.489 v1@4.15,20.55 ; U4.11@5.402,29.049 C15.2@6,29.646 ; C15.2@6.002,29.648 6.098,29.648 6.35,29.9 6.75,29.9 v1(7.05,30.2) ; U20.20@9.85,23.55 9.95,23.65 v1(10.7,23.65) 10.85,23.5 U20.1@10.85,22.7
  Bottom Layer w0.254: U4.16@4.75,26.6 4.85,26.5 v1(4.85,25.9) 5,25.9 5.4,25.5 5.4,24.546 U3.11@4.802,23.949 ; 9.25,28.5 10.6,28.5 C29.1@10.7,28.4 ; 9.7,28.5 v1(9.7,29.5)
  other v1: 4,20.5
5V: C13.2 C18.2 C32.2 C55.2 J2.12 L3.2 U17.1 U17.2 U21.1 U21.3 U22.1 U22.3 | length 44.9
  Top Layer w0.127: v1@12.7,16.4 13.5,16.4 13.9,16.8 U21.3@13.9,18.05 ; 13.9,9.65 13.9,11.95 14.25,12.3 J2.12@15.05,12.3
  Top Layer w0.254: U22.3@3.2,27.5 3,27.5 2.85,27.35 2.05,27.35 1.55,27.85 1.55,28.6 1.75,28.8 2.35,28.8 U22.1@3.2,28.8 3.2,29.4 4.85,31.05 8,31.05 v1(8.55,30.5) ; U21.1@12.6,18.1 12.6,16.3 v1@12.7,16.4
  flex bottom w0.254: v1(8.55,30.5) 8.8,30.25 8.8,29.15 11.85,26.1 11.85,18.85 12.6,18.1 v1(12.6,16.4) v1@12.6,16.3
  layer 5 w0.254: v1(12.6,16.4) 12.7,16.4 14.6,14.5 v1(14.6,9.8)
  Bottom Layer w0.254: L3.2@13.4,8.45 13.4,8.5 13.75,8.85 C55.2@14.45,8.85 ; C55.2@14.6,8.95 v1(14.6,9.8)
24V: C3.2 C4.2 C5.2 C6.2 C7.2 C8.2 C9.1 D1.2 U18.A1 U18.A2 U18.C1 | length 25
  Top Layer w0.508: C6.2@12.539,1.848 12.539,2.572 C8.2@12.539,4.731
  Top Layer w1.016: 3.941,2.064 C3.2@3.941,3.08 C5.2@3.941,4.858 v6(3.941,7.106) ; 4.195,2.318 8.729,2.318 v6(8.983,2.572) C7.2@12.539,2.572
  Bottom Layer w0.254: U18.A1@6.7,7.6 U18.C1@6.7,10 ; v6(8.983,2.572) 9.602,3.191 D1.2@13.791,3.191
  Bottom Layer w1.016: v6(3.941,7.106) 4.5,7.106 C9.1@4.919,7.525
ADC_CS: U1.F1 U20.11 | length 1.7
  Top Layer w0.127: U1.F1@6.4,19.3 v1(6.4,20)
  Bottom Layer w0.127: v1(6.4,20) 6.4,20.35 U20.11@6.7,20.65
  Bottom Layer w0.254: U20.11@6.7,20.65 U20.11@6.95,20.65
ADC_IN0: U19.1 U19.2 U20.16 | length 2.8
  Bottom Layer w0.127: U20.16@7.85,23.55 7.85,24.25 8.6,25 8.6,25.5 U19.1@9.1,25.5
ADC_IN1: U19.6 U19.7 U20.17 | length 11.8
  Bottom Layer w0.127: U19.6@8.05,28.75 8.1,28.7 8.6,28.7 8.6,29.4 9.3,30.1 10.15,30.1 11.4,28.85 11.4,26.65 9.4,24.65 8.8,24.65 8.35,24.2 U20.17@8.35,23.55
ADC_MISO: U1.G7 U20.14 | length 10.4
  Top Layer w0.127: v1(5.192,14.894) 5.206,14.894 U1.G7@5.6,14.5
  Bottom Layer w0.127: v1(5.192,14.894) 5.194,14.894 5.2,14.9 5.2,15.6 4.9,15.9 4.1,15.9 3.858,16.142 3.858,17.458 5.4,19 5.4,21 6.55,22.15 U20.14@6.95,22.15
ADC_MOSI: U1.H5 U20.12 | length 6.6
  Top Layer w0.127: v1(4.4,16.5) U1.H5@4.8,16.1
  Bottom Layer w0.127: v1(4.4,16.5) 4.9,17 4.9,17.65 5.908,18.658 5.908,20.608 6.45,21.15 U20.12@6.95,21.15
ADC_SCK: U1.H4 U20.13 | length 6.2
  Top Layer w0.127: v1(4.4,17.3) U1.H4@4.8,16.9
  Bottom Layer w0.127: v1(4.4,17.3) 4.4,17.55 5.654,18.804 5.654,20.804 6.5,21.65 U20.13@6.95,21.65
DAC0: U1.A6
EMIT_0_0: R5.1 U3.5 U8.E | length 64
  flex bottom w0.254: v2(-21.95,7.45) -21.85,5.65 -22,5.15 -22.35,4.7 -24.276,-2.074 -24.25,-2.6 -23.85,-2.95 -18.4,-3.7 -14.4,-5.95 -14.003,-6.053 -7.8,-6.482 -5.3,-4.75 -4.223,-2.827 -0.7,22.6 0.2,23.65 1.3,23.65 v1@1.35,23.7
  flex top w0.254: U8.E@-22.6,8.7 R5.1@-22.853,7.396 v2(-21.95,7.45)
  Bottom Layer w0.127: v1@1.35,23.7 U3.5@1.95,23.7
  other v1: 1.4,23.65
EMIT_0_1: R1.1 U4.9 U5.E | length 33.1
  flex top w0.254: R1.1@-19.953,25.196 U5.E@-19.7,26.45 ; U5.E@-19.649,26.657 -16.05,23.205 -7.949,21.601 -6.15,21.15 -4.6,21.15 -2.6,23.15 -2.6,24.05 0.817,27.467 2.35,27.467 4.482,29.6 4.5,29.6 v1@5.35,30.45
  Bottom Layer w0.127: U4.9@4.695,29.756 4.85,29.911 v1@5.3,30.35
  other v1: 5.3,30.5
EMIT_1_0: R7.1 U3.7 U9.E | length 56.2
  flex bottom w0.254: v2(-13.95,-5.15) -12.35,-5.65 -7.95,-5.95 -5.7,-4.4 -4.75,-2.6 -1.1,24.3 0.35,25.75 1.794,25.756 v1@2.05,25.5
  flex top w0.254: U9.E@-24,-0.15 -24.25,-1.5 -24.15,-1 -23.2,-1.25 -16.95,-4.15 v2(-13.95,-5.15)
  Bottom Layer w0.127: v1@2.05,25.4 2.05,25.004 U3.7@2.751,24.302
  other v1: 2.05,25.55
EMIT_1_1: R2.1 U3.8 U6.E | length 34.6
  flex top w0.254: R2.1@-21.303,16.396 U6.E@-21.05,17.65 ; U6.E@-21.046,17.894 -17.7,15.1 -16.6,14.95 -15.9,14.45 -14.55,14.15 -11.85,13.7 -11.15,14.3 -11.05,16.6 -10.5,18.75 -10.05,19.25 -8.25,19.9 -6.1,19.6 -3.9,19.6 0.9,24.4 2.4,24.4 2.75,24.75 2.75,24.85 2.761,24.861 v1(2.761,25.489)
  Bottom Layer w0.127: v1(2.761,25.489) 2.761,25 U3.8@3.105,24.656
EMIT_2_0: R9.1 U3.2 U10.E | length 23.3
  flex bottom w0.254: v2(-0.75,10.35) 0.15,17.45 v1(2,19.25)
  flex top w0.254: U10.E@-8.45,6.75 R9.1@-8.25,5.7 ; R9.1@-8.25,5.65 -7.35,5.6 -6.25,6.3 -4.35,6.3 -1.05,9.6 v2(-0.75,10.35)
  Bottom Layer w0.127: v1(2,19.25) 2.25,19.5 2.25,21.396 U3.2@2.751,21.898
EMIT_2_1: R3.1 U4.5 U7.E | length 12.6
  flex top w0.254: R3.1@-6.4,23.7 -6.397,25.1 -4.05,25.1 -0.2,28.95 1.35,28.95 v1(1.9,29.5)
  Bottom Layer w0.127: v1(1.9,29.5) 1.9,29.439 U4.5@2.644,28.695
EMIT_3_0: R14.1 U3.3 U14.E | length 26.6
  flex top w0.254: R14.1@-16.3,6.45 -15.601,7.603 -13.4,8.25 -12.15,12.2 -9.5,13.25 -6.55,13.25 -3.9,15.5 v1(1.6,20.2)
  Bottom Layer w0.127: v1@1.6,20.25 1.6,21.45 U3.3@2.398,22.251
EMIT_3_1: R10.1 U4.8 U11.E | length 25.5
  flex top w0.254: R10.1@-13.408,24.197 -13.188,25.583 -7.848,22.252 -6.1,21.65 -4.792,21.658 -3.15,23.3 -3.15,24.35 0.45,27.95 2.145,27.95 3.745,29.55 3.75,29.55 3.75,30.65 v1@3.75,30.7
  Bottom Layer w0.127: U4.8@3.705,29.756 3.561,29.9 3.561,30.461 v1@3.75,30.65
  other v1: 3.7,30.65
EMIT_4_0: R16.1 U4.2 U15.E | length 50.5
  flex bottom w0.254: v2(-12.1,-4.9) -8.1,-5.35 -6.2,-4.05 -5.25,-2.45 -1.65,25.2 0.7,27.6 2.06,27.6 2.95,26.71 2.95,26.35 v1@2.95,26.2
  flex top w0.254: R16.1@-17,-2.5 U15.E@-16.807,-1.156 ; -16.95,-2.1 -15.3,-2.75 v2(-12.1,-4.9)
  Bottom Layer w0.127: v1@2.95,26.2 2.95,26.6 U4.2@3.351,26.998
  other v1: 2.95,26.25
EMIT_4_1: R11.1 U4.3 U12.E | length 23.7
  flex top w0.254: R11.1@-14.55,15.5 U12.E@-14.342,16.753 ; U12.E@-14.3,16.7 -12.25,16.95 -11.05,19 -10.35,19.75 -8.7,20.5 -8.503,20.5 -6.15,20.15 -4.15,20.15 -1.325,22.975 -1.325,23.525 1.35,26.2 2,26.2 v1@2.3,26.5
  Bottom Layer w0.127: v1@2.25,26.45 2.55,26.75 2.55,26.904 U4.3@2.998,27.351
  other v1: 2.3,26.45
EMIT_5_0: R18.1 U4.10 U16.E | length 45.3
  flex bottom w0.254: v2@-6.05,-2.25 v2(-6.2,-2.15) -4.9,5.1 -2.15,26.35 0.2,28.7 3.55,28.7 3.95,29.1 5,29.1 6.1,30.2 v1(6.1,30.4)
  flex top w0.254: R18.1@-9.65,-3.55 U16.E@-9.483,-2.015 ; U16.E@-9.5,-2.05 v2(-6.2,-2.15)
  Bottom Layer w0.127: U4.10@5.049,29.402 v1@6.048,30.402
EMIT_5_1: R12.1 U3.4 U13.E | length 13.4
  flex top w0.254: R12.1@-7.719,14.648 U13.E@-7.6,15.75 ; U13.E@-7.556,16.035 -6.615,16.035 -5.9,16.75 -5.05,16.75 -3.9,17.9 -2.85,17.9 v1(1.45,22.2)
  Bottom Layer w0.127: v1(1.45,22.2) 1.639,22.2 U3.4@2.044,22.605
ERASE: J2.6 U1.C5 | length 8.4
  Top Layer w0.127: U1.C5@8.8,16.1 9.2,15.7 11,15.7 11.3,16 12.35,16 12.5,15.85 13.15,15.85 13.4,15.6 13.4,13.95 13.85,13.5 J2.6@14.9,13.5